# EAGLE board RFIDELMH (EAGLE 7.6.0)
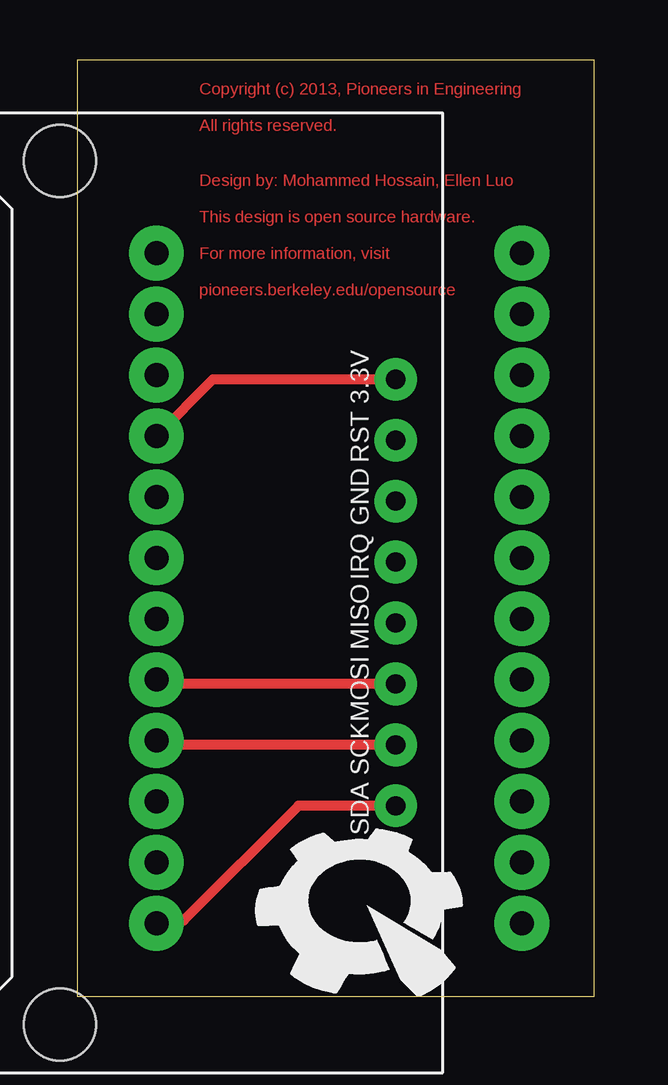
[diagram p0: board, top side]
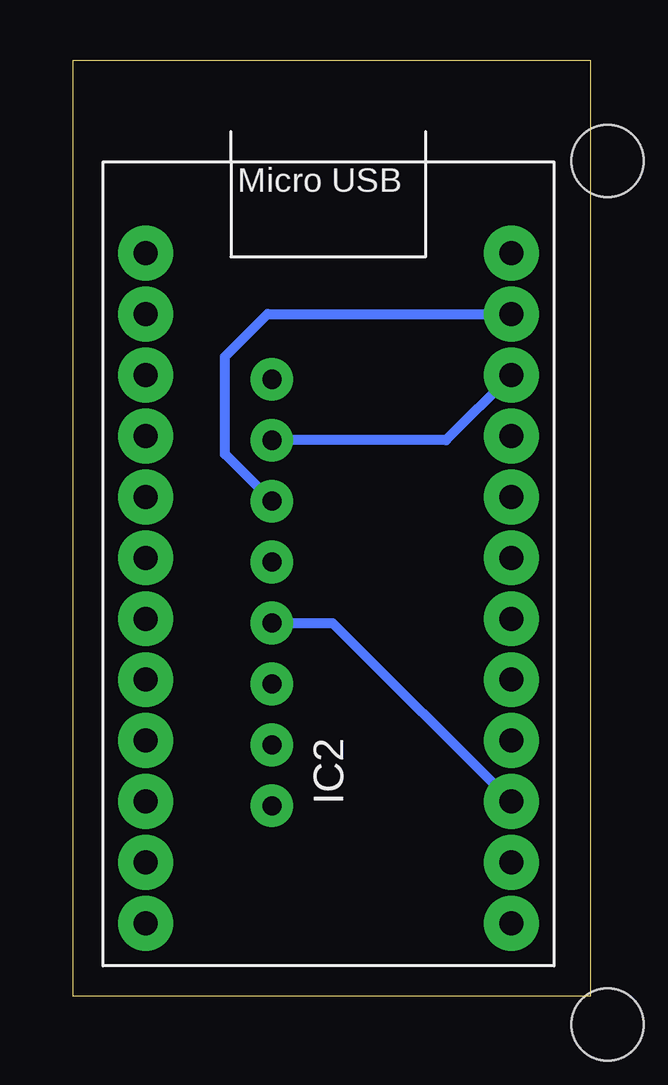
[diagram p1: board, bottom side, seen from below]

Size 21.57 x 39.04 mm. Coordinates in mm from the lower left corner, seen from the top.
Outline: 0,0 21.57,0 21.57,39.04 0,39.04 0,0
Copper layers (1*16): Top 2mil / dielectric 9mil / Bottom 2mil
Design rules "pie": minimum track width 6mil, minimum drill 15mil, track to track 6mil, track to pad 6mil, pad to pad 6mil, via to via 6mil, smd to smd 6mil, copper to edge 25mil, drill to drill 7mil, minimum pad ring 7mil, minimum via ring 7mil, stop-mask expansion 3mil, vias tented up to drill 21mil, thermal gap 10mil

## Footprints (pad centres in the part's own frame; a part is rotated, then mirrored left to right if it is on the bottom)
RFID_SENSOR = drill 0.8 pad 1.778: 3.3V 11.1,59; GND 16.18,59; IRQ 18.72,59; MISO 21.26,59; MOSI 23.8,59; RST 13.64,59; SCK 26.34,59; SDA 28.88,59 | hole 3: 2,45; 38,45
ARDUINO_PRO_MICRO = drill 1 pad 2.286: 2 1.778,19.558; 3 1.778,17.018; 4 1.778,14.478; 5 1.778,11.938; 6 1.778,9.398; 7 1.778,6.858; 8 1.778,4.318; 9 1.778,1.778; 10 17.018,1.778; 14 17.018,6.858; 15 17.018,9.398; 16 17.018,4.318; A0 17.018,11.938; A1 17.018,14.478; A2 17.018,17.018; A3 17.018,19.558; GND@0 1.778,24.638; GND@1 1.778,22.098; GND@2 17.018,27.178; RAW 17.018,29.718; RST 17.018,24.638; RXI 1.778,27.178; TXO 1.778,29.718; VCC 17.018,22.098

## Placement (x,y rotation side)
IC1  RFID_SENSOR  [RFID_SENSOR]  -45.72,36.83 270 top
IC2  ARDUINO_PRO_MICRO  [ARDUINO_PRO_MICRO]  20.32,1.27 0 bottom
U$1  [PIE-LOGO-SMALL]  12.06,3.81 0 top

## Library data of the parts
IC1 IC2 U$1 = pie

## Nets
GND: IC1.GND IC2.GND@2
MISO: IC1.MISO IC2.14
MOSI: IC1.MOSI IC2.A0
RST: IC1.RST IC2.RST
SCK: IC1.SCK IC2.15
SDA: IC1.SDA IC2.10
VCC: IC1.3.3V IC2.VCC

## Tracks (layer width: path | path; a pad name or v marks a point on that pad's centre or on a via)
GND
  Bottom 0.406: IC1.GND 15.24,22.61 15.24,26.67 13.46,28.45 IC2.GND@2
MISO
  Bottom 0.406: IC1.MISO 10.74,15.57 IC2.14
MOSI
  Top 0.406: IC1.MOSI 3.48,13.03 IC2.A0
RST
  Bottom 0.406: IC2.RST 6.02,23.19 IC1.RST
SCK
  Top 0.406: IC1.SCK 3.48,10.49 IC2.15
SDA
  Top 0.406: IC1.SDA 9.22,7.95 4.45,3.17 IC2.10
VCC
  Top 0.406: IC2.VCC 5.66,25.73 IC1.3.3V

## Text on the board
Top: Copyright (c) 2013, Pioneers in Engineering / / All rights reserved. / / / Design by: Mohammed Hossain, Ellen Luo / / This design is open source hardware. / / For more information, visit / / pioneers.berkeley.edu/opensource